# EAGLE board Mundo Senai (EAGLE 7.6.0)

Size 73.58 x 114.19 mm. Coordinates in mm from the lower left corner, seen from the top.
Outline: 0,0 56.82,0 56.82,53.33 0,53.33 0,0
Copper layers (1*16): Top 0.035mm / dielectric 1.5mm / Bottom 0.035mm
Design rules "default": minimum track width 10mil, minimum drill 24mil, track to track 8mil, track to pad 8mil, pad to pad 8mil, via to via 8mil, smd to smd 8mil, copper to edge 40mil, drill to drill 8mil, minimum pad ring 10mil, minimum via ring 8mil, stop-mask expansion 4mil, vias tented up to drill 0mil, thermal gap 10mil

## Footprints (pad centres in the part's own frame; a part is rotated, then mirrored left to right if it is on the bottom)
DC-POWER = drill 0.889 pad 2.54 octagon: + 0,2.54; - 0,-2.54
M3XXH = drill 1.016 long: 1 -3.81,3.81; 2 -3.81,-3.81; O -6.35,-3.81; P 6.35,-3.81; P@ 6.35,3.81; S -6.35,3.81
2P-2.54-65/35MIL = drill 0.889 pad 1.651 square: 1 0,1.27 | drill 0.889 pad 1.651: 2 0,-1.27
ARDUINO_UNO = drill 1.016 pad 1.88: 0 63.5,50.8; 1 60.96,50.8; 2 58.42,50.8; 3 55.88,50.8; 3.3V 35.56,2.54; 4 53.34,50.8; 5 50.8,50.8; 5V 38.1,2.54; 6 48.26,50.8; 7 45.72,50.8; 8 41.656,50.8; 9 39.116,50.8; 10 36.576,50.8; 11 34.036,50.8; 12 31.496,50.8; 13 28.956,50.8; A0 50.8,2.54; A1 53.34,2.54; A2 55.88,2.54; A3 58.42,2.54; A4 60.96,2.54; A5 63.5,2.54; AREF 23.876,50.8; GND 26.416,50.8; GND. 43.18,2.54; GND.. 40.64,2.54; I/OREF 30.48,2.54; N/C 27.94,2.54; RESET 33.02,2.54; SCL 18.796,50.8; SDA 21.336,50.8; VIN 45.72,2.54 | hole 3.2: 66.04,7.62; 66.04,35.56; 15.24,50.8; 13.97,2.54

## Placement (x,y rotation side)
BAT1  [DC-POWER]  5,22.78 0 top
BAT2  [DC-POWER]  5,86.28 0 top
BAT3  [DC-POWER]  5,124.38 0 top  (outside the outline)
K1  [M3XXH]  5,98.98 0 top
K2  [M3XXH]  5,35.48 0 top
K3  [M3XXH]  5,48.18 0 top
K4  [M3XXH]  5,111.68 0 top
M1  [2P-2.54-65/35MIL]  5,10.08 0 top
M2  [2P-2.54-65/35MIL]  5,73.58 0 top
U1  [ARDUINO_UNO]  5,60.88 0 top

## Library data of the parts
BAT1-BAT3 K1-K4 M1 M2 U1 = AUTODESK_CIRCUITS_BREADBOARD

## Nets
N$1: BAT1.+ K2.S K3.S
N$2: BAT1.- K2.O K3.O
N$3: K2.P@ M1.2
N$4: K3.P M1.1
N$5: K2.2 U1.8
N$6: K3.1 U1.9
N$7: BAT2.- K1.O K4.O
N$8: BAT2.+ K1.S K4.S
N$9: K4.P M2.1
N$10: K1.P@ M2.2
N$11: BAT3.+ K4.2
N$12: BAT3.- K4.1
N$13: K3.2 U1.GND.
N$14: K2.1 U1.GND..

## Tracks (layer width: path | path; a pad name or v marks a point on that pad's centre or on a via)
N$1  (2 unrouted)
N$2  (2 unrouted)
N$3  (1 unrouted)
N$4  (1 unrouted)
N$5  (1 unrouted)
N$6  (1 unrouted)
N$7  (2 unrouted)
N$8  (2 unrouted)
N$9  (1 unrouted)
N$10  (1 unrouted)
N$11  (1 unrouted)
N$12  (1 unrouted)
N$13  (1 unrouted)
N$14  (1 unrouted)